# Altium PCB ScopeVideoOnly.PcbDoc
Units mil, origin at the board's own origin, x right, y up, seen from the top; angles counter-clockwise.
Board outline 2000 x 2000 mil, 2 copper layers (Top Layer, Bottom Layer); 37 components, 23 nets, 81 pads, 6 vias.
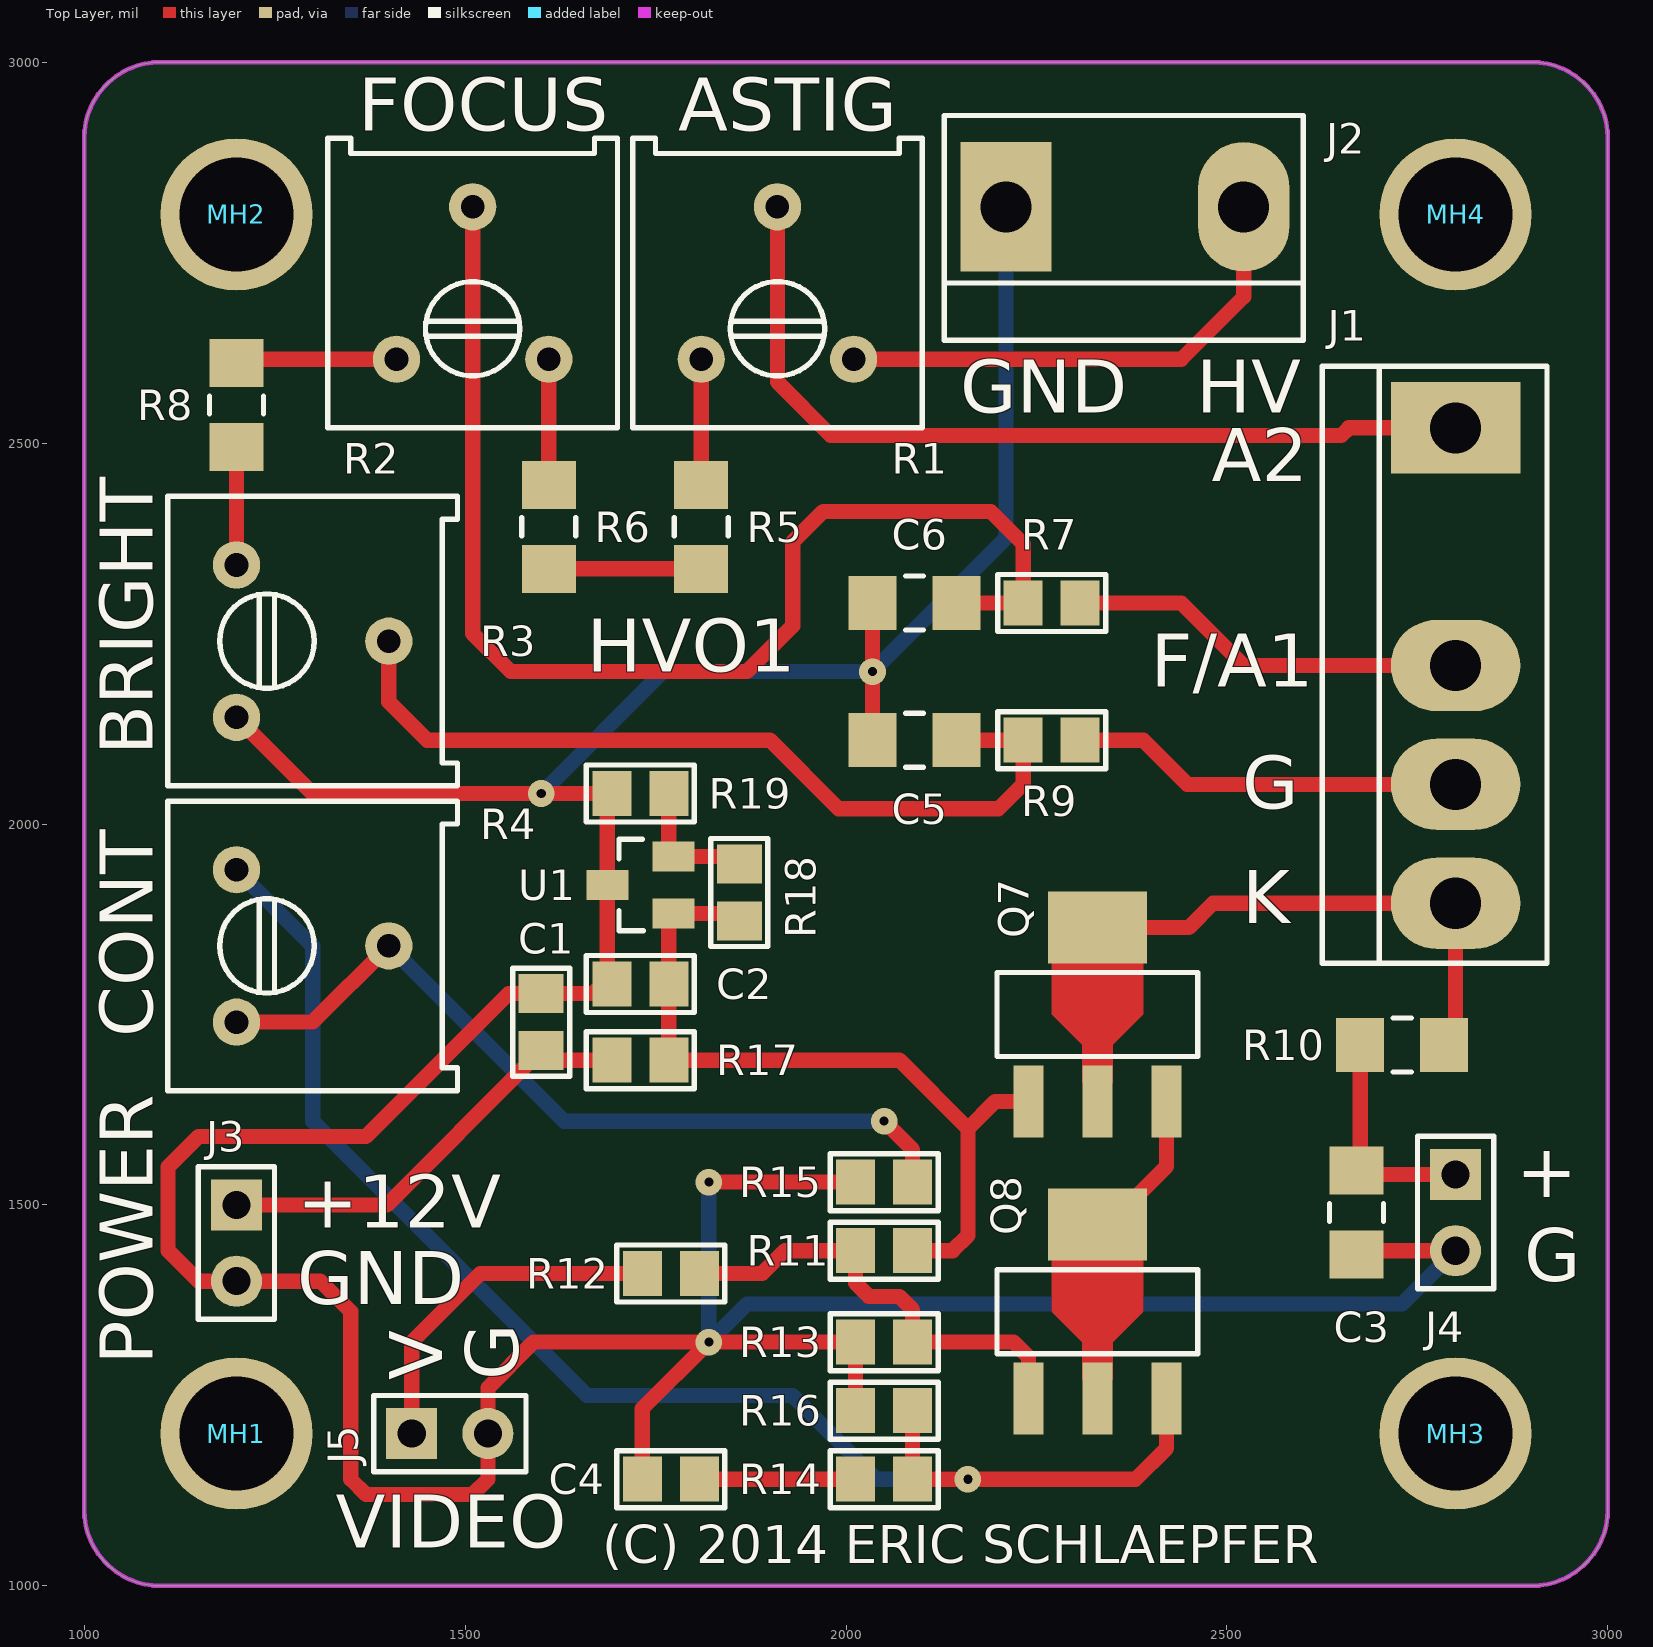
[diagram p0: Top Layer view]
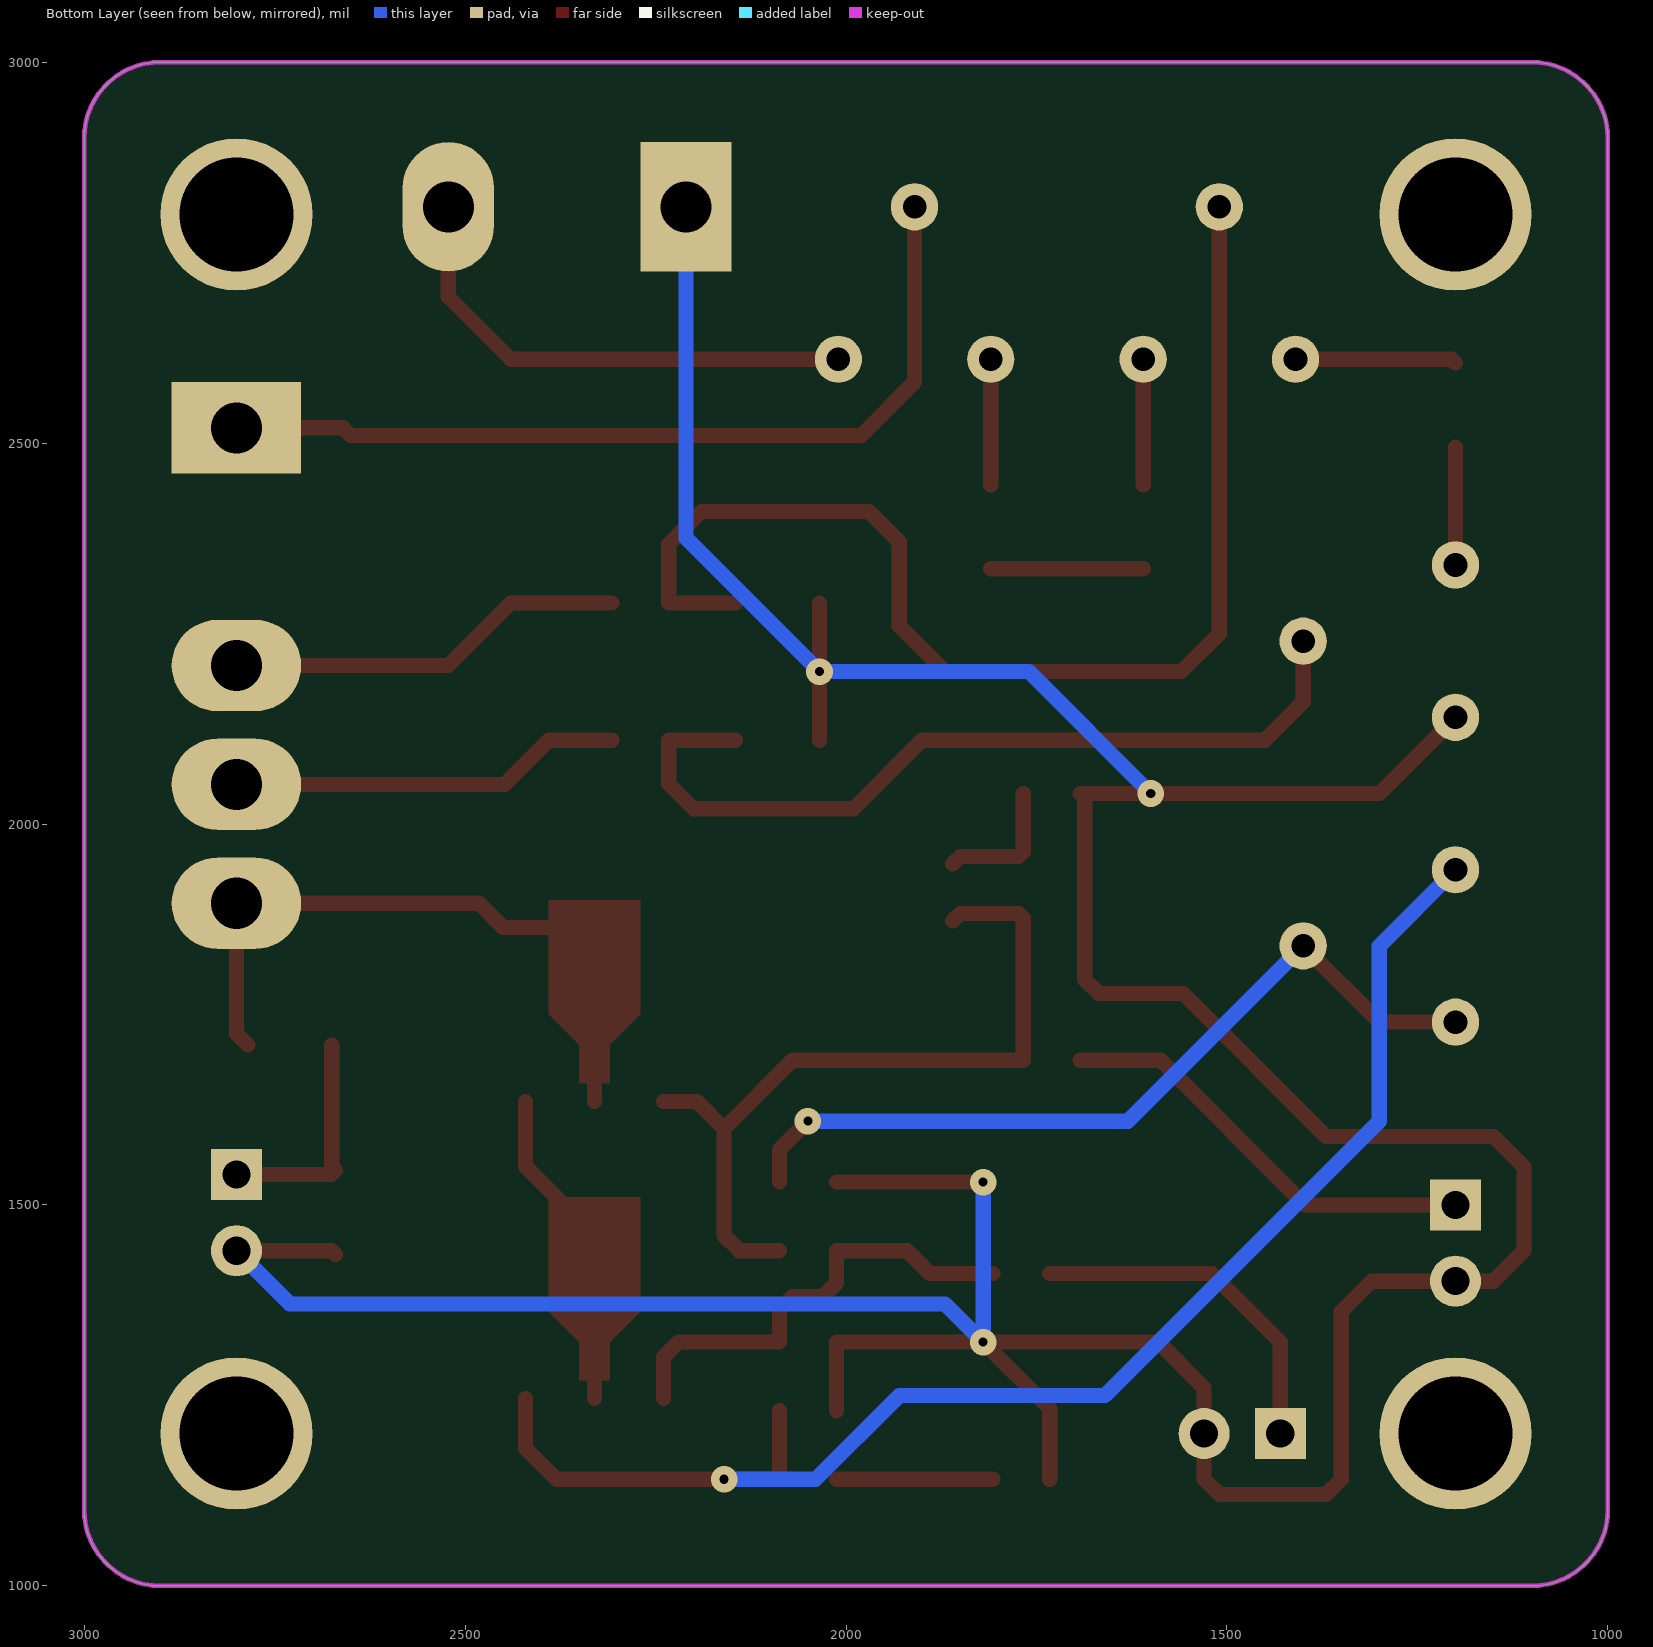
[diagram p1: Bottom Layer view, seen from below]

## Layer stack, top to bottom
Top Solder: solder mask 0.4, Solder Resist, Dk 3.5
Top Layer: signal copper 1.4
Dielectric 1: dielectric 12.6, FR-4, Dk 4.8
Bottom Layer: signal copper 1.4
Bottom Solder: solder mask 0.4, Solder Resist, Dk 3.5

## Board outline
1000,1100 1000,2900 cw(c1100,2900) 1100,3000 2900,3000 cw(c2900,2900) 3000,2900 3000,1100 cw(c2900,1100) 2900,1000 1100,1000 cw(c1100,1100) 1000,1100

## Design rules (kind name [scope] priority, off if disabled: settings)
Clearance [InPolygon] p1: gap=15
Clearance Clearance_1 [All] p2: gap=8
HoleSize [All] p1: absolutevalues=TRUE maxlimit=200 minlimit=12 maxpercent=80.000 minpercent=20.000
PolygonConnect PolygonConnect_1 [InNet('NetQ1_1') or InNet('NetD1_A') or InNet('NetC5_1') or InNet('NetC1_1')] p1: connectstyle=Direct reliefconductorwidth=10 reliefentries=4 polygonreliefangle="90 Angle" airgapwidth=10
PolygonConnect [All] p2: connectstyle=Relief reliefconductorwidth=10 reliefentries=4 polygonreliefangle="90 Angle" airgapwidth=10
RoutingVias [All] p1: holewidth=12 width=35 viastyle="Through Hole" minholewidth=12 minwidth=35 maxholewidth=28 maxwidth=50
SolderMaskExpansion [All] p1: expansion=4
Width [All] p1: maxlimit=100 minlimit=8 preferedwidth=10 minimp=50.000000 maximp=50.000000 favimp=50.000000
28 further rules are at their usual default settings.

## Classes and differential pairs
net class HV: FOCUS NetC6_1 NetJ1_1 NetR1_2 NetR2_1 NetR2_2 NetR5_1
component class ScopeVideoOnly: C1 C2 C3 C4 C5 C6 J1 J2 J3 J4 J5 Q7 Q8 R1 R2 R3 R4 R5 R6 R7 R8 R9 R10 R11 R12 R13 R14 R15 R16 R17 R18 R19 U1

## Components (designator, comment, footprint, x,y, rotation, side; value= is the part's Value field where it differs from the comment)
C1 "Cap" G_0805[2012] 1600,1740 r270 top
C2 "Cap" G_0805[2012] 1730,1790 r0 top
C3 "Cap" G_1206[3216] 2670,1490 r270 top
C4 "Cap" G_0805[2012] 1770,1140 r180 top
C5 "Cap" G_1206[3216] 2090,2110 r180 top
C6 "Cap" G_1206[3216] 2090,2290 r180 top
J1 "CON4" HDR5S156M2 2800,2520 r0 top
J2 "HV" HDR3S156M1 2210,2810 r90 top
J3 "12V" HDR2S 1200,1500 r0 top
J4 "60V" HDR2S 2800,1540 r0 top
J5 "12V" HDR2S 1430,1200 r90 top
MH1 "Comment" M_MTHOLE 1200,1200 r0 top
MH2 "Comment" M_MTHOLE 1200,2800 r0 top
MH3 "Comment" M_MTHOLE 2800,1200 r0 top
MH4 "Comment" M_MTHOLE 2800,2800 r0 top
Q7 "NPN" G_SOT223T 2330,1750 r90 top
Q8 "NPN" G_SOT223T 2330,1360 r90 top
R1 "ASTIG" "POT_TRIM BOURNS 3386F" 1910,2710 r180 top
R2 "FOCUS" "POT_TRIM BOURNS 3386F" 1510,2710 r180 top
R3 "BRIGHT" "POT_TRIM BOURNS 3386F" 1300,2240 r90 top
R4 "CONT" "POT_TRIM BOURNS 3386F" 1300,1840 r90 top
R5 "Res1" G_1206[3216] 1810,2390 r90 top
R6 "Res1" G_1206[3216] 1610,2390 r270 top
R7 "Res1" G_0805[2012] 2270,2290 r180 top
R8 "Res1" G_1206[3216] 1200,2550 r90 top
R9 "Res1" G_0805[2012] 2270,2110 r180 top
R10 "Res1" G_1206[3216] 2730,1710 r180 top
R11 "Res1" G_0805[2012] 2050,1440 r180 top
R12 "Res1" G_0805[2012] 1770,1410 r0 top
R13 "Res1" G_0805[2012] 2050,1320 r180 top
R14 "Res1" G_0805[2012] 2050,1140 r180 top
R15 "Res1" G_0805[2012] 2050,1530 r180 top
R16 "Res1" G_0805[2012] 2050,1230 r180 top
R17 "Res1" G_0805[2012] 1730,1690 r180 top
R18 "Res1" G_0805[2012] 1860,1910 r90 top
R19 "Res1" G_0805[2012] 1730,2040 r180 top
U1 "ZTL431A" G_SOT23 1730,1920 r90 top

## Footprints (in the part's own frame and the unit in brackets; to place one, negate y for a bottom-side part, rotate by r counter-clockwise, add the part's x,y. Pads: shape width x height; smd on the part's side, far side on the other; paste and mask are expansions set on the pad)
G_0805[2012] [mm] "Generic 0805"
  rect 1.3x1.5 smd: 1(-0.95,0) 2(0.95,0)
  silkscreen extent -1.8,-0.95 1.8,0.95, body extent -1,-0.6 1,0.6
G_1206[3216] [mm] "Generic 1206"
  rect 1.6x1.8 smd: 1(-1.4,0) 2(1.4,0)
  silkscreen extent -0.3,-0.9 0.3,0.9, body extent -1.6,-0.8 1.6,0.8
G_SOT23 [mm]
  rect 1x1.4 smd: 1(-0.95,-1.1) 2(0.95,-1.1) 3(0,1.1)
  silkscreen extent -1.52,-0.1 1.52,0.71, body extent -1.45,-0.64 1.45,0.64
G_SOT223T [mm] "SOT223, 4-Leads, Body 6.5x3.5mm, Pitch 2.3mm, Lead Span 7mm, IPC Medium Density"
  rect 2.4x1 smd: B(-2.9,2.3) C(-2.9,0) E(-2.9,-2.3)
  rect 2.4x3.3 smd: C(2.9,0)
  silkscreen extent -1.4,-3.35 1.4,3.35, body extent -1.85,-3.35 1.85,3.35, height 1.8
HDR2S [mil]
  rect 67x67 hole 37: 1(0,0)
  round 67 hole 37: 2(0,-100)
  silkscreen extent -50,-150 50,50
HDR3S156M1 [mil]
  rect 170x120 hole 67: 1(0,0)
  oval 170x120 hole 67: 2(0,-312)
  silkscreen extent -175,-390 120,81
HDR5S156M2 [mil]
  rect 170x120 hole 67: 1(0,0)
  oval 170x120 hole 67: 2(0,-312) 3(0,-468) 4(0,-624)
  silkscreen extent -175,-703 120,81
M_MTHOLE [mil]
  round 200 hole 150: 1(0,0)
"POT_TRIM BOURNS 3386F" [mil]
  round 62 hole 31: 1(-100,100) 2(100,100) 3(0,-100)
  silkscreen extent -190,-190 190,190, body extent -190,-190 190,190

## Part data
C1 C2 C3 C4 C5 C6: "Capacitor"
J1: "Connector, 4 pin"
J2 J3 J4 J5: library part CON2, "Connector, 2 pin"
Q7 Q8: "NPN Bipolar Transistor"
R1 R2 R3 R4: library part Pot, "Variable Resistor"
R5 R6 R7 R8 R9 R10 R11 R12 R13 R14 R15 R16 R17 R18 R19: library part Res, "Resistor"
U1: library part TL431, "Adjustable Shunt Reg"

## Via types
v1: diameter 35, hole 12, Top Layer to Bottom Layer, 6 vias

## Nets (pads, with @x,y where several pads share a name; then routed paths per layer and width w, separated by ;. In a path a pad name is that pad's centre, name@x,y a point inside that pad or via, vN(x,y) a via of type N, cw(c..) or ccw(c..) an arc to the next point about the centre after c; other vN are vias at no path point)
CATHODE: J1.4 Q7.C R10.1 | length 903.7
  Top Layer w20: Q7.C@2330,1635.83 2330,1864.17 2450,1864.17 2481.83,1896 J1.4 2800,1724.88 R10.1
FOCUS: J1.2 R7.1 | length 526.6
  Top Layer w20: R7.1 2440,2290 2522,2208 J1.2
GND: C1.1 C2.1 C3.2 C4.2 C5.2 C6.2 J2.1 J3.2 J4.2 J5.2 R3.1 R13.2 R15.2 R16.2 R19.2 U1.3 | length 6120.6
  Top Layer w20: R3.1 1300,2040 v1(1600,2040) R19.2 1686.69,2034.09 U1.3 1686.69,1795.91 1668.19,1777.4 C1.1 1557.4,1777.4 1370,1590 1150,1590 1110,1550 1110,1440 1150,1400 J3.2 1310,1400 1350,1360 1350,1140 1370,1120 1510,1120 1530,1140 J5.2 1530,1260 1590,1320 v1(1820,1320) ; C4.2 1732.6,1232.6 v1(1820,1320) ; v1(1820,1530) R15.2 ; R16.2 R13.2 v1(1820,1320) ; C5.2 v1(2034.88,2200) C6.2 ; C3.2 2675.12,1440 J4.2
  Bottom Layer w20: v1(1600,2040) 1760,2200 v1(2034.88,2200) 2210,2375.12 J2.1 ; v1(1820,1530) v1(1820,1320) 1870,1370 2730,1370 J4.2
GRID: J1.3 R9.1 | length 516.6
  Top Layer w20: R9.1 2390,2110 2448,2052 J1.3
NetC1_2: C1.2 J3.1 R17.2 | length 571.3
  Top Layer w20: J3.1 1397.4,1500 1587.4,1690 R17.2
NetC3_1: C3.1 J4.1 R10.2 | length 291.8
  Top Layer w20: C3.1 2674.88,1550 R10.2 ; C3.1@2675.12,1540 J4.1
NetC4_1: C4.1 R14.2 | length 205.2
  Top Layer w20: C4.1 R14.2
NetC5_1: C5.1 R3.3 R9.2 | length 1129
  Top Layer w20: R3.3 1400,2160 1450,2110 1900,2110 1990,2020 2200,2020 2232.6,2052.6 R9.2 C5.1
NetC6_1: C6.1 R2.3 R7.2 | length 1637.3
  Top Layer w20: R2.3 1510,2250 1560,2200 1870,2200 1930,2260 1930,2370 1970,2410 2190,2410 2232.6,2367.4 R7.2 C6.1
NetJ1_1: J1.1 R1.3 | length 1153.1
  Top Layer w20: R1.3 1910,2580 1980,2510 2650,2510 2660,2520 J1.1
NetJ2_2: J2.2 R1.1 | length 664
  Top Layer w20: R1.1 2440,2610 2522,2692 J2.2
NetQ7_E: Q7.E Q8.C | length 435.8
  Top Layer w20: Q8.C@2330,1245.83 2330,1474.17 2344.17,1474.17 2420.55,1550.55 Q7.E
NetQ8_B: Q8.B R11.2 R12.2 R13.1 | length 606.9
  Top Layer w20: R12.2 1890,1410 1920,1440 R11.2 2012.6,1397.4 2030,1380 2070,1380 2087.4,1362.6 R13.1 2220,1320 2239.45,1300.55 Q8.B
NetQ8_E: Q8.E R4.2 R14.1 R16.1 | length 1931.3
  Top Layer w20: R16.1 R14.1 v1(2160,1140) 2380,1140 2420.55,1180.55 Q8.E
  Bottom Layer w20: R4.2 1300,1840 1300,1610 1660,1250 1930,1250 2040,1140 v1(2160,1140)
NetR1_2: R1.2 R5.2 | length 164.9
  Top Layer w20: R5.2 R1.2
NetR2_1: R2.1 R6.1 | length 164.9
  Top Layer w20: R6.1 R2.1
NetR2_2: R2.2 R8.2 | length 212
  Top Layer w20: R8.2 1204.88,2610 R2.2
NetR3_2: R3.2 R8.1 | length 154.9
  Top Layer w20: R3.2 R8.1
NetR4_1: R4.1 R4.3 R15.1 | length 1082.2
  Top Layer w20: R4.1 1300,1740 R4.3 ; v1(2050,1610) 2087.4,1572.6 R15.1
  Bottom Layer w20: R4.3 1630,1610 v1(2050,1610)
NetR5_1: R5.1 R6.2 | length 200
  Top Layer w20: R6.2 R5.1
NetR18_2: R18.2 R19.1 U1.2 | length 175.9
  Top Layer w20: R19.1 1767.4,1963.31 U1.2 1850,1957.4 R18.2
VCC: C2.2 Q7.B R11.1 R17.1 R18.1 U1.1 | length 1030.9
  Top Layer w20: R18.1 1850,1882.6 U1.1 1767.4,1876.69 C2.2 R17.1 2070,1690 2160,1600 ; R11.1 2140,1440 2160,1460 2160,1600 ; Q7.B 2195.83,1635.83 2160,1600
VIDEO: J5.1 R12.1 | length 459.9
  Top Layer w20: J5.1 1430,1320 1520,1410 R12.1
pads on no net: MH1.1 MH2.1 MH3.1 MH4.1

## Keep-outs
Keep-Out Layer:
  the board outline again, w6

## Other copper
Top Layer:
  region net CATHODE: 2270,1900 2270,1750 2310,1710 2310,1660 2350,1660 2350,1710 2390,1750 2390,1900
  region net NetQ7_E: 2270,1510 2270,1360 2310,1320 2310,1270 2350,1270 2350,1320 2390,1360 2390,1510

## Silkscreen, mask and mechanical layers (free items; w line width, h text height)
Top Overlay:
  text "FOCUS" at 1360,2910 h70
  text "ASTIG" at 1780,2910 h70
  text "GND" at 2150,2540 h70
  text "HV" at 2460,2540 h70
  text "A2" at 2480,2450 h70
  text "HVO1" at 1660,2200 h70
  text "F/A1" at 2400,2180 h70
  text "BRIGHT" at 1090,2090 h70 r90
  text "G" at 2520,2020 h70
  text "K" at 2520,1870 h70
  text "CONT" at 1090,1720 h70 r90
  text "+" at 2880,1510 h70
  text "+12V" at 1280,1470 h70
  text "G" at 2890,1400 h70
  text "GND" at 1280,1370 h70
  text "POWER" at 1090,1290 h70 r90
  text "V" at 1470,1270 h70 r90
  text "G" at 1570,1270 h70 r90
  text "VIDEO" at 1330,1050 h70
  text "(C) 2014 ERIC SCHLAEPFER" at 1680,1030 h50